# Altium PCB wifiPinBoard_1.pcbdoc (part 1 of 2)
Units mil, origin at the board's own origin, x right, y up, seen from the top; angles counter-clockwise.
Board outline 4044.61 x 2473.5 mil, 2 copper layers (Top Layer, Bottom Layer); 86 components, 80 nets, 330 pads, 327 vias.
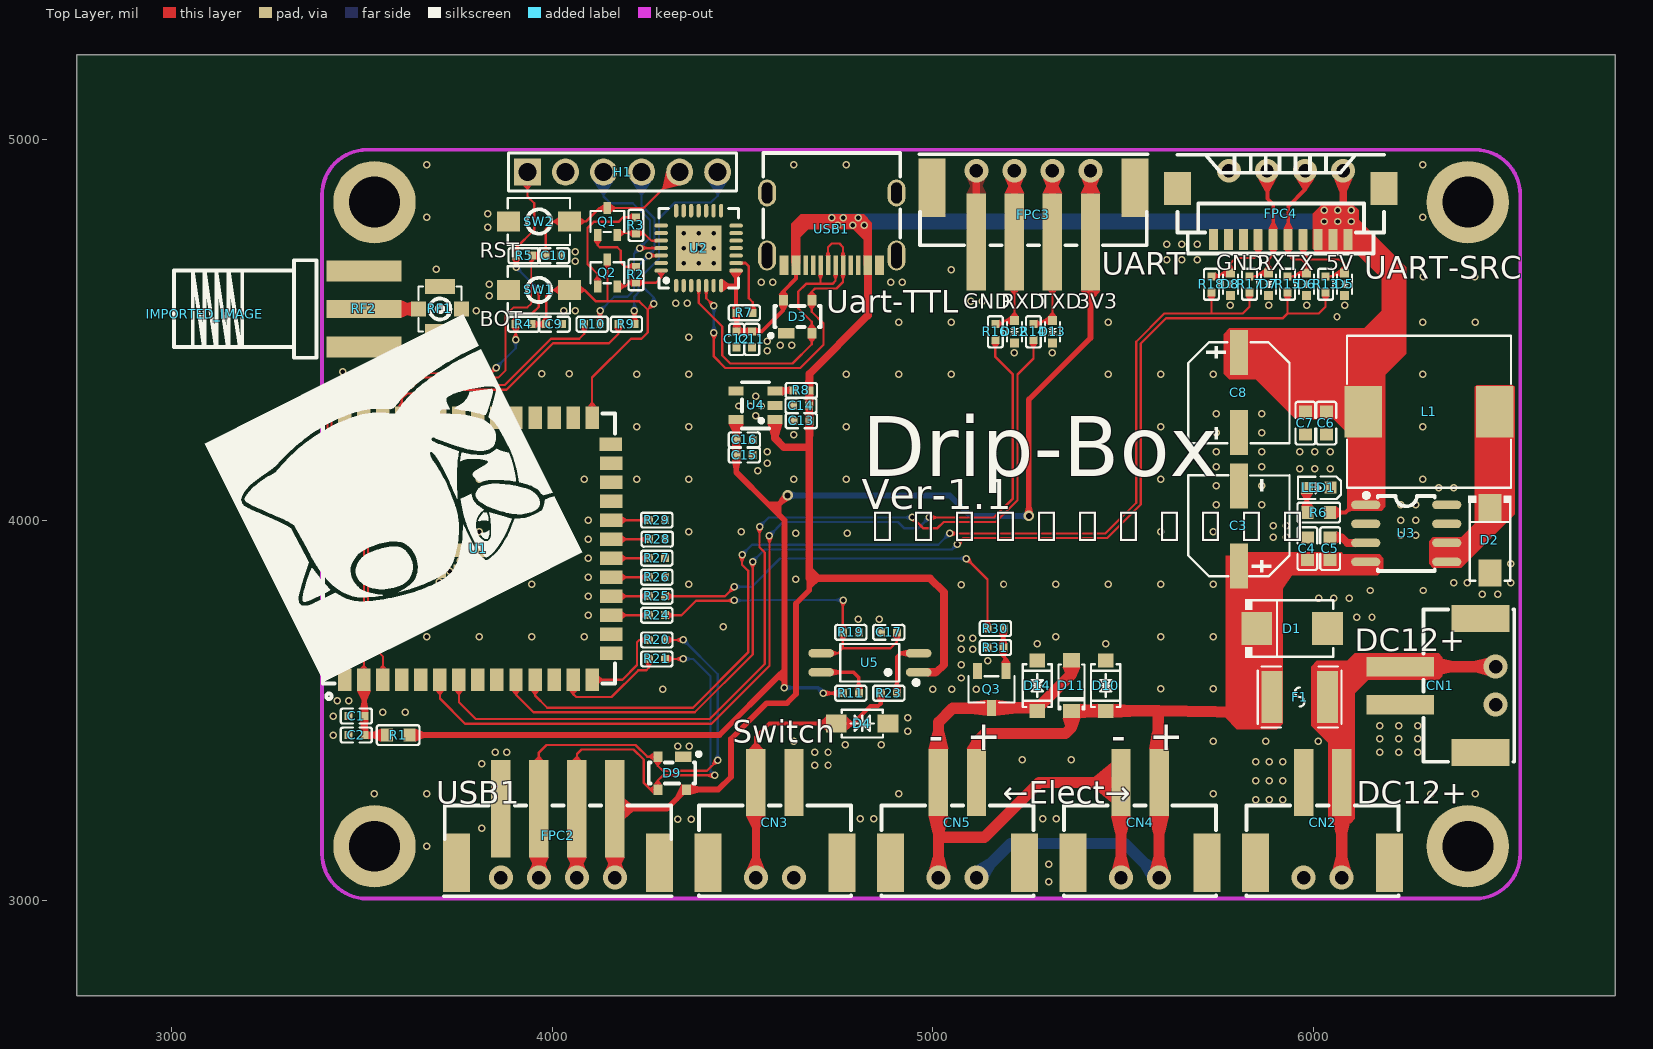
[diagram p0: Top Layer view]
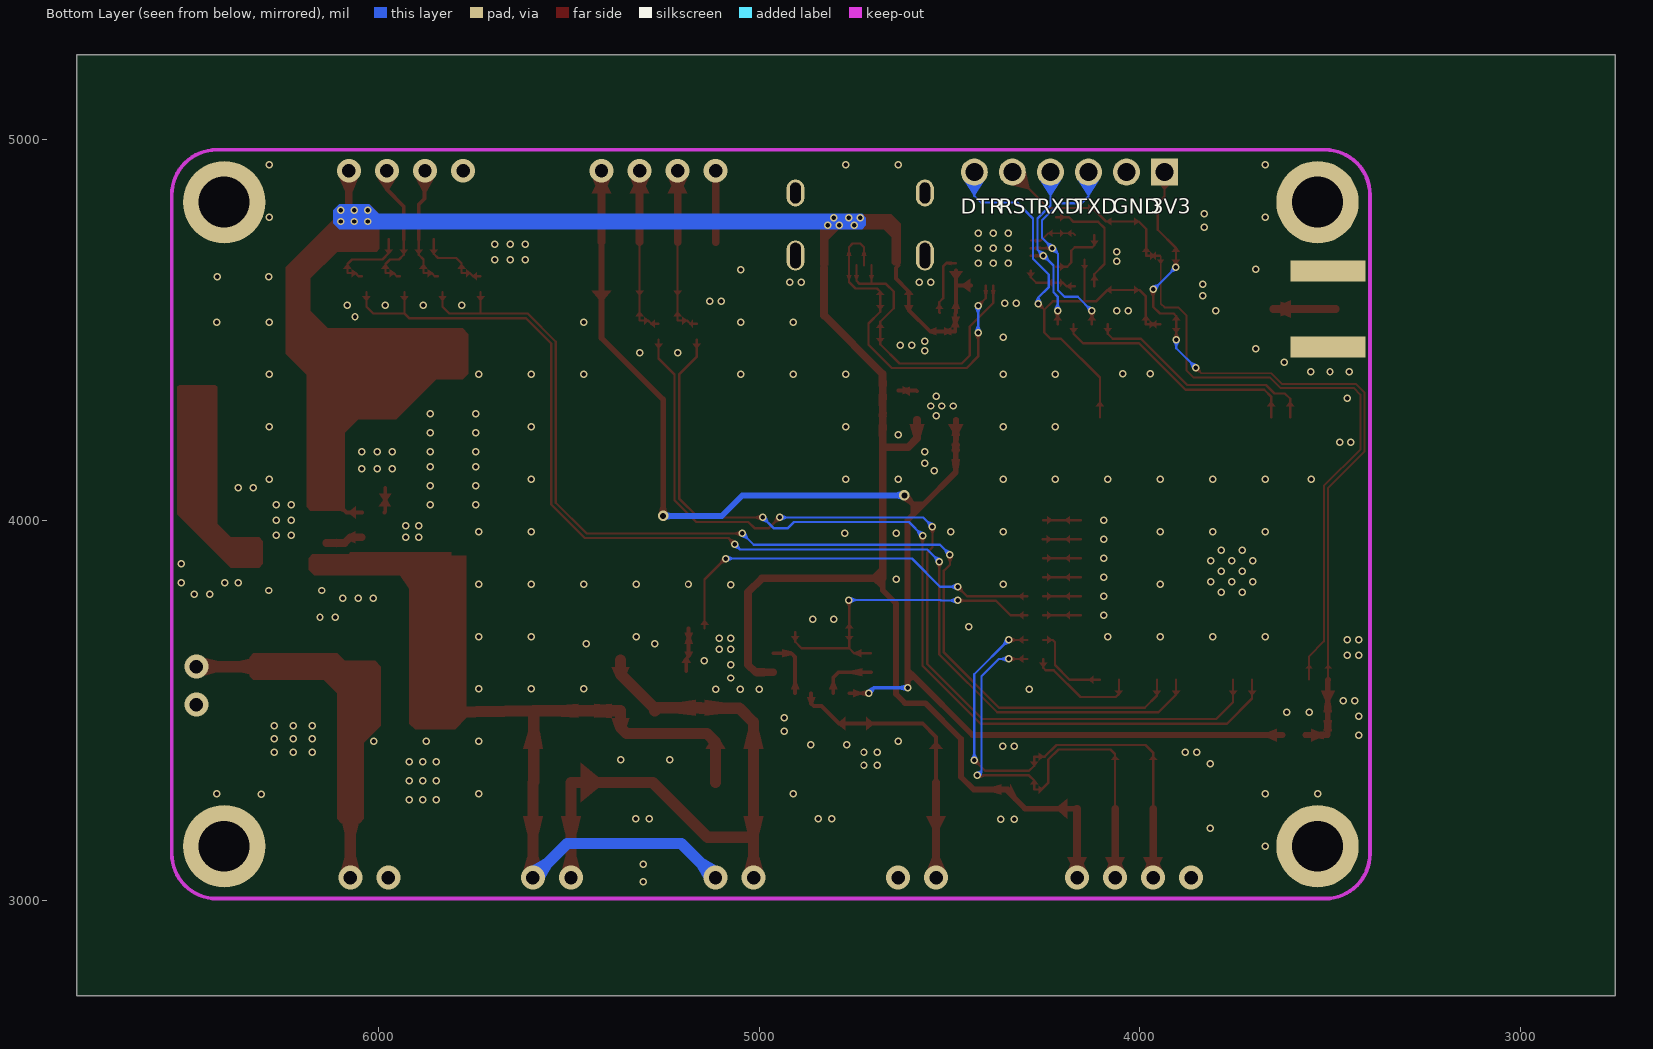
[diagram p1: Bottom Layer view, seen from below]

## Layer stack, top to bottom
Top Layer: signal copper (thickness not stored)
Dielectric: dielectric 12.6, FR-4, Dk 4.8
Bottom Layer: signal copper (thickness not stored)

## Board outline
6794.61,2750 2750,2750 2750,5223.5 6794.61,5223.5

## Components (designator, comment, footprint, x,y, rotation, side; value= is the part's Value field where it differs from the comment)
C1 "CAP-0603" C0402 3485,3485 r180 top
C2 "CAP-0603" C0402 3485,3435 r180 top
C3 "RVT47UF50V67RV0029" CAP-SMD_BD6.3-L6.6-W6.6-LS7.6-FD 5805,3985 r90 top
C4 "CAP-0603" C0603 5985,3925 r90 top
C5 "CAP-0603" C0603 6045,3925 r90 top
C6 "CAP-0603" C0603 6035,4255 r270 top
C7 "CAP-0603" C0603 5980,4255 r270 top
C8 "RVE100UF35V67RV0072" CAP-SMD_BD6.3-L6.6-W6.6-LS7.6-FD-1 5805,4335 r270 top
C9 "CAP-0402" C0402 4005,4515 r0 top
C10 "CAP-0402" C0402 4004,4695 r0 top
C11 "CAP-0402" C0402 4525,4475 r270 top
C12 "CAP-0402" C0402 4485,4475 r270 top
C13 "CAP-0402" C0402 4655,4261 r180 top
C14 "CAP-0402" C0402 4654,4301 r180 top
C15 "CAP-0402" C0402 4505,4171 r0 top
C16 "CAP-0402" C0402 4505,4211 r0 top
C17 "CAP-0402" C0402 4885,3705 r180 top
CN1 "2.54-2A-LT" CONN-SMD_2P-P2.54_XH2.54-2AB 6335,3565 r270 top
CN2 "2.54-2A-LT" CONN-SMD_2P-P2.54_XH2.54-2AB 6025,3205 r180 top
CN3 "2.54-2A-LT" CONN-SMD_2P-P2.54_XH2.54-2AB 4585.6,3205 r180 top
CN4 "2.54-2A-LT" CONN-SMD_2P-P2.54_XH2.54-2AB 5545.2,3205 r180 top
CN5 "2.54-2A-LT" CONN-SMD_2P-P2.54_XH2.54-2AB 5065.4,3205 r180 top
D1 "SMBJ16A_C2848701" SMB_L4.5-W3.7-LS5.4-RD 5945,3715 r0 top
D2 "SS54_C22452" SMA_L4.4-W2.8-LS5.4-R-RD 6465,3945 r270 top
D3 "SP0503BAHTG_C7074" SOT-143_L2.9-W1.3-P1.92-LS2.3-BR 4645,4535 r270 top
D4 "SMF6.0CA_C435459" SOD-123_L2.7-W1.8-LS3.7-BI 4815,3465 r180 top
D5 "PESD3V3S1BA-N_C316037" SOD-523_L1.2-W0.8-LS1.6-BI 6083,4620 r90 top
D6 "PESD3V3S1BA-N_C316037" SOD-523_L1.2-W0.8-LS1.6-BI 5983,4620 r90 top
D7 "PESD3V3S1BA-N_C316037" SOD-523_L1.2-W0.8-LS1.6-BI 5883,4620 r90 top
D8 "PESD3V3S1BA-N_C316037" SOD-523_L1.2-W0.8-LS1.6-BI 5783,4620 r90 top
D9 "SP0503BAHTG_C7074" SOT-143_L2.9-W1.3-P1.92-LS2.3-BR 4315,3335 r90 top
D10 "SMF12CA_C284110" SOD-123_L2.8-W1.8-LS3.7-BI 5455,3565 r90 top
D11 "1N4148W_C2099" SOD-123_L2.8-W1.8-LS3.7-RD 5365,3565 r90 top
D12 "PESD3V3S1BA-N_C316037" SOD-523_L1.2-W0.8-LS1.6-BI 5215,4495 r90 top
D13 "PESD3V3S1BA-N_C316037" SOD-523_L1.2-W0.8-LS1.6-BI 5315,4495 r90 top
D14 "SMF12CA_C284110" SOD-123_L2.8-W1.8-LS3.7-BI 5275,3565 r90 top
F1 "BSMD1812-200-24V" F1812 5965,3535 r180 top
FPC2 "XH-4PS" CONN-SMD_4P-P2.50_DEALON_XH-4PS 4015,3167.78 r0 top
FPC3 "XH-4PS" CONN-SMD_4P-P2.50_DEALON_XH-4PS 5265,4805 r180 top
FPC4 "XF3M(1)-1015-1B" FPC-SMD_10P-P1.00_XF3M1-1015-1B 5915,4805 r180 top
H1 "2.54-1x6P直针" HDR-TH_6P-P2.54-V-M-1 4185,4915 r0 top
IMPORTED_IMAGE "IMPORTED_IMAGE" IMPORTED_IMAGE 3086.35,4541.33 r0 top
L1 "SLO1040H470MTT" IND-SMD_L10.8-W10.0_SLO1040H 6305,4285 r0 top
LED1 "NCD0603R1_C84263" LED0603-RD_RED 6015,4085 r180 top
Q1 "MMST5551_C109331" SOT-323-3_L2.0-W1.3-P1.30-LS2.1-BR 4145,4785 r270 top
Q2 "MMST5551_C109331" SOT-323-3_L2.0-W1.3-P1.30-LS2.1-BR 4145,4650 r270 top
Q3 "AO3400A_C20917" SOT-23-3_L2.9-W1.6-P1.90-LS2.8-BR 5155,3555 r90 top
R1 "RES-0603" R0603 3595,3435 r180 top
R2 "RES-0402" R0402_1 4220,4645 r270 top
R3 "RES-0402" R0402_1 4220,4775 r270 top
R4 "RES-0402" R0402_1 3925,4515 r180 top
R5 "RES-0402" R0402_1 3926,4695 r180 top
R6 "RES-0603" R0603 6015,4020 r180 top
R7 "RES-0402" R0402_1 4505,4545 r0 top
R8 "RES-0402" R0402_1 4655,4341 r0 top
R9 "RES-0402" R0402_1 4195,4515 r180 top
R10 "RES-0402" R0402_1 4105,4515 r180 top
R11 "RES-0402" R0402_1 4785,3545 r0 top
R13 "RES-0402" R0402_1 6033,4620 r270 top
R14 "RES-0402" R0402_1 5265,4495 r270 top
R15 "RES-0402" R0402_1 5933,4620 r270 top
R16 "RES-0402" R0402_1 5165,4495 r270 top
R17 "RES-0402" R0402_1 5833,4620 r270 top
R18 "RES-0402" R0402_1 5733,4620 r270 top
R19 "RES-0402" R0402_1 4785,3705 r0 top
R20 "RES-0402" R0402_1 4275,3685 r180 top
R21 "RES-0402" R0402_1 4275,3635 r180 top
R23 "RES-0402" R0402_1 4885,3545 r0 top
R24 "RES-0402" R0402_1 4275,3750 r180 top
R25 "RES-0402" R0402_1 4275,3800 r180 top
R26 "RES-0402" R0402_1 4275,3850 r180 top
R27 "RES-0402" R0402_1 4275,3900 r180 top
R28 "RES-0402" R0402_1 4276,3950 r180 top
R29 "RES-0402" R0402_1 4275,4000 r180 top
R30 "RES-0402" R0402_1 5165,3715 r0 top
R31 "RES-0402" R0402_1 5165,3665 r0 top
RF1 "KH-IPEX-K501-29" ANT-SMD_KH-IPEX-K501-29 3705,4555 r270 top
RF2 "KH-SMA-KE8-G" CONN-SMD_KH-SMA-KE8-G 3485,4555.01 r90 top
SW1 "3*4两脚按键不带柱" SW-SMD_L4.0-W2.9-LS5.0 3965,4605 r0 top
SW2 "3*4两脚按键不带柱" SW-SMD_L4.0-W2.9-LS5.0 3965,4785 r0 top
U1 "ESP32-S3-WROOM-1U-N16" WIRELM-SMD_ESP32-S3-WROOM-1U 3805,3925 r90 top
U2 "CP2102-GMR_1" QFN-28_L5.0-W5.0-P0.50-BL-EP_1 4385,4715 r0 top
U3 "XL2012E1" SOIC-8_L5.0-W4.0-P1.27-LS6.0-BL 6245,3965 r270 top
U4 "spx3819m5-l-3-3/tr" SOT-23-5_L3.0-W1.7-P0.95-LS2.8-BR 4534.45,4301.55 r0 top
U5 "EL3H7(B)(TA)-G" SOP-4_L4.4-W2.8-P1.27-LS7.0-TL 4835,3625 r180 top
USB1 "TYPE-C-16P" USB-C-SMD_KH-TYPE-C-16P 4735,4765 r180 top

## Footprints (in the part's own frame and the unit in brackets; to place one, negate y for a bottom-side part, rotate by r counter-clockwise, add the part's x,y. Pads: shape width x height; smd on the part's side, far side on the other; paste and mask are expansions set on the pad)
ANT-SMD_KH-IPEX-K501-29 [mm]
  rect 1x1 smd paste+0 mask+0.051: 1(0,-1.425) 4(0,1.425)
  rect 1x2 smd paste+0 mask+0.051: 2(-1.5,0) 3(1.5,0)
  silkscreen extent -1.5,-1.42 1.5,1.42
C0402 [mil]
  rect 21x21 smd paste-3937.01 mask+2: 1(-21,0) 2(21,0)
  silkscreen extent -41,-20 41,20
C0603 [mil]
  rect 32x34 smd paste-3937.01 mask+2: 1(-29.7,0) 2(29.7,0)
  silkscreen extent -56,-26 56,26
CAP-SMD_BD6.3-L6.6-W6.6-LS7.6-FD [mm]
  rect 3x1.199 smd paste+0 mask+0.051: 1(-2.67,0) 2(2.67,0)
  silkscreen extent -3.38,-3.38 3.38,3.38
CAP-SMD_BD6.3-L6.6-W6.6-LS7.6-FD-1 [mm]
  rect 3x1.2 smd paste+0 mask+0.051: 1(-2.67,0) 2(2.67,0)
  silkscreen extent -3.38,-3.38 3.38,3.38
CONN-SMD_2P-P2.54_XH2.54-2AB [mm]
  rect 1.3x4.5 smd paste+0 mask+0.051: 1(-1.269,-2.675) 2(1.27,-2.675)
  rect 1.8x3.9 smd paste+0 mask+0.051: 3(-4.47,2.675) 4(4.47,2.675)
  silkscreen extent -5.08,-1.13 5.08,4.93
CONN-SMD_4P-P2.50_DEALON_XH-4PS [mm]
  rect 1.3x6.5 smd paste+0 mask+0.05: 1(-3.81,1.875) 2(-1.27,1.875) 3(1.27,1.875) 4(3.81,1.875)
  rect 1.8x3.9 smd paste+0 mask+0.05: 5(-6.777,-1.748) 6(6.777,-1.748)
  silkscreen extent -7.61,-3.98 7.6,2.09
CONN-SMD_KH-SMA-KE8-G [mm]
  rect 1.4x5 smd paste+0 mask+0.05: 1(-2.55,-0.508) 2(2.55,-0.508)
  rect 1.4x5 smd far side paste+0 mask+0.05: 3(-2.55,-0.508) 4(2.55,-0.508)
  rect 1.2x5 smd paste+0 mask+0.05: 5(0,-0.508)
  silkscreen extent -3.25,2.67 3.25,12.19
F1812 [mil]
  rect 55.38x137.76 smd paste-3937.01 mask+2: 1(-72.97,0) 2(72.97,0)
  silkscreen extent -110,-80 110,80
FPC-SMD_10P-P1.00_XF3M1-1015-1B [mm]
  rect 0.6x1.4 smd paste+0 mask+0.051: 1(-4.5,1.7) 2(-3.5,1.7) 3(-2.5,1.7) 4(-1.5,1.7) 5(-0.5,1.7) 6(0.5,1.7) 7(1.5,1.7) 8(2.5,1.7) 9(3.5,1.7) 10(4.5,1.7)
  rect 1.8x2.2 smd paste+0 mask+0.051: 11(6.9,-1.7) 12(-6.9,-1.7)
  silkscreen extent -6.9,-3.95 6.9,2.64
HDR-TH_6P-P2.54-V-M-1 [mm]
  rect 1.8x1.8 hole 1.2 paste+0 mask+0.051: 1(-6.35,0)
  round 1.8 hole 1.2 paste+0 mask+0.051: 2(-3.81,0) 3(-1.27,0) 4(1.27,0) 5(3.81,0) 6(6.35,0)
  silkscreen extent -7.62,-1.27 7.62,1.27
IMPORTED_IMAGE [mil]
  silkscreen extent 0,-966 993,0
IND-SMD_L10.8-W10.0_SLO1040H [mm]
  rect 2.5x3.419 smd paste+0 mask+0.051: 1(4.397,0) 2(-4.397,0)
  silkscreen extent -5.48,-5.07 5.48,5.08
LED0603-RD_RED [mm]
  rect 0.8x0.8 smd paste+0 mask+0.051: 1(-0.8,-0.003) 2(0.8,0.003)
  silkscreen extent -1.49,-0.75 1.39,0.76
QFN-28_L5.0-W5.0-P0.50-BL-EP_1 [mm]
  oval 0.279x0.899 smd paste+0 mask+0.051: 1(-1.501,-2.499) 2(-1.001,-2.499) 3(-0.5,-2.499) 4(0,-2.499) 5(0.5,-2.499) 6(1.001,-2.499) 7(1.501,-2.499) 15(1.501,2.499) 16(1.001,2.499) 17(0.5,2.499) 18(0,2.499) 19(-0.5,2.499) 20(-1.001,2.499) 21(-1.501,2.499)
  oval 0.899x0.279 smd paste+0 mask+0.051: 8(2.499,-1.501) 9(2.499,-1.001) 10(2.499,-0.5) 11(2.499,0) 12(2.499,0.5) 13(2.499,1.001) 14(2.499,1.501) 22(-2.499,1.501) 23(-2.499,1.001) 24(-2.499,0.5) 25(-2.499,0) 26(-2.499,-0.5) 27(-2.499,-1.001) 28(-2.499,-1.501)
  round 0.5 hole 0.3 paste+0 mask-25.4: 29(-1,-1) 29(-1,0) 29(-1,1) 29(0,-1) 29(0,0) 29(0,1) 29(1,-1) 29(1,0) 29(1,1)
  rect 3.048x3.048 smd paste+0 mask+0.051: 29(0,0)
  silkscreen extent -2.65,-2.65 2.65,2.65
R0402_1 [mil]
  rect 21x21 smd paste-3937.01 mask+2: 1(-21,0) 2(21,0)
  silkscreen extent -41,-20 41,20
R0603 [mil]
  rect 31.8x34 smd paste-3937.01 mask+2: 1(-29.7,0) 2(29.7,0)
  silkscreen extent -56,-26 56,26
SMA_L4.4-W2.8-LS5.4-R-RD [mm]
  rect 1.8x1.539 smd paste+0 mask+0.051: 1(2.123,0) 2(-2.25,0)
  silkscreen extent -3.03,-1.43 2.65,1.43
SMB_L4.5-W3.7-LS5.4-RD [mil]
  rect 80.6x86.3 smd paste+0 mask+2: 1(-92.9,0) 2(92.9,0)
  silkscreen extent -123,-77 108,77
SOD-123_L2.7-W1.8-LS3.7-BI [mm]
  rect 1.4x1.2 smd paste+0 mask+0.051: 1(-1.735,0) 2(1.735,0)
  silkscreen extent -1.38,-0.93 1.38,0.93
SOD-123_L2.8-W1.8-LS3.7-BI [mm]
  rect 0.93x1.06 smd paste+0 mask+0.051: 1(1.685,0) 2(-1.685,0)
  silkscreen extent -1.43,-0.98 1.43,0.98
SOD-123_L2.8-W1.8-LS3.7-RD [mm]
  rect 0.95x1.15 smd paste+0 mask+0.051: 1(-1.692,0) 2(1.692,0)
  silkscreen extent -1.58,-0.87 1.41,0.87
SOD-523_L1.2-W0.8-LS1.6-BI [mm]
  rect 0.6x0.6 smd paste+0 mask+0.051: 1(-0.75,0) 2(0.75,0)
  silkscreen extent -0.65,-0.5 0.65,0.5
SOIC-8_L5.0-W4.0-P1.27-LS6.0-BL [mil]
  oval 22.38x76.78 smd paste+0 mask+2: 1(-75,-106.5) 2(-25,-106.5) 3(25,-106.5) 4(75,-106.5) 5(75,106.5) 6(25,106.5) 7(-25,106.5) 8(-75,106.5)
  silkscreen extent -106,-111 98,75
SOP-4_L4.4-W2.8-P1.27-LS7.0-TL [mm]
  oval 1.71x0.56 smd paste+0 mask+0.051: 1(-3.255,0.635) 2(-3.255,-0.635) 3(3.255,-0.635) 4(3.255,0.635)
  silkscreen extent -3.24,-1.25 1.97,1.47
SOT-23-3_L2.9-W1.6-P1.90-LS2.8-BR [mm]
  rect 1.07x0.6 smd paste+0 mask+0.051: 1(1.235,-0.95) 2(1.235,0.95) 3(-1.235,0)
  silkscreen extent -0.88,-1.54 0.88,1.54
SOT-23-5_L3.0-W1.7-P0.95-LS2.8-BR [mil]
  rect 39.4x23.6 smd paste+0 mask+2: 1(51.2,-37.4) 2(51.2,0) 3(51.2,37.4) 4(-51.2,37.4) 5(-51.2,-37.4)
  silkscreen extent -35,-61 35,61
SOT-143_L2.9-W1.3-P1.92-LS2.3-BR [mm]
  rect 0.7x1.1 smd paste+0 mask+0.051: 1(1.1,-0.75)
  rect 0.7x0.6 smd paste+0 mask+0.051: 2(1.1,0.95) 3(-1.1,0.95) 4(-1.1,-0.95)
  silkscreen extent -0.7,-1.9 1.4,1.55
SOT-323-3_L2.0-W1.3-P1.30-LS2.1-BR [mm]
  rect 0.8x0.5 smd paste+0 mask+0.051: 1(0.898,-0.65) 2(0.898,0.65) 3(-0.898,0)
  silkscreen extent -0.7,-1.13 0.7,1.13
SW-SMD_L4.0-W2.9-LS5.0 [mm]
  rect 1.53x1.36 smd paste+0 mask+0.051: 1(-2.035,0) 2(2.035,0)
  silkscreen extent -2.08,-1.58 2.08,1.58
USB-C-SMD_KH-TYPE-C-16P [mm]
  oval 1.2x2 hole 0.7 slot 1.7 at 90 deg paste+0 mask+0.051: 1(-4.32,1.765) 2(4.32,1.765)
  oval 1.2x1.8 hole 0.7 slot 1.4 at 90 deg paste+0 mask+0.051: 3(-4.32,-2.415) 4(4.32,-2.415)
  rect 0.3x1.3 smd paste-100 mask+0.051: A1(-3.35,2.415) A4(-2.55,2.415) A5(-1.25,2.415) A6(-0.25,2.415) A7(0.25,2.415) A8(1.25,2.415) A9(2.55,2.415) A12(3.35,2.415) B1(3.05,2.415) B4(2.25,2.415) B5(1.75,2.415) B6(0.75,2.415) B7(-0.75,2.415) B8(-1.75,2.415) B9(-2.25,2.415) B12(-3.05,2.415)
  silkscreen extent -4.57,-5.08 4.57,0.57
WIRELM-SMD_ESP32-S3-WROOM-1U [mm]
  rect 1.5x0.9 smd paste+0 mask+0.05: 1(-8.75,8.895) 2(-8.75,7.625) 3(-8.75,6.355) 4(-8.75,5.085) 5(-8.75,3.815) 6(-8.75,2.545) 7(-8.75,1.275) 8(-8.75,0.005) 9(-8.75,-1.265) 10(-8.75,-2.535) 11(-8.75,-3.805) 12(-8.75,-5.075) 13(-8.75,-6.345) 14(-8.75,-7.615) 27(8.75,-7.615) 28(8.75,-6.345) 29(8.75,-5.075) 30(8.75,-3.805) 31(8.75,-2.535) 32(8.75,-1.265) 33(8.75,0.005) 34(8.75,1.275) 35(8.75,2.545) 36(8.75,3.815) 37(8.75,5.085) 38(8.75,6.355) 39(8.75,7.625) 40(8.75,8.895)
  rect 0.9x1.5 smd paste+0 mask+0.05: 15(-6.985,-8.895) 16(-5.715,-8.895) 17(-4.445,-8.895) 18(-3.175,-8.895) 19(-1.905,-8.895) 20(-0.635,-8.895) 21(0.635,-8.895) 22(1.905,-8.895) 23(3.175,-8.895) 24(4.445,-8.895) 25(5.715,-8.895) 26(6.985,-8.865)
  rect 0.9x0.9 smd paste+0 mask+0.051: 41(-2.9,-0.225) 41(-2.9,1.175) 41(-2.9,2.575) 41(-1.5,2.575) 41(-1.5,-0.225) 41(-1.5,1.175) 41(-0.1,2.575) 41(-0.1,1.175) 41(-0.1,-0.225)
  silkscreen extent -10.04,-9.14 9.02,10.36

## Free pads (board coordinates)
  round 216.54 hole 133.86 mask+4: 1(3532.8,3142.8) 1(6406.81,3142.8) 1(6406.81,4835.71) 3(3532.8,4835.71)

## Via types
v1: diameter 19.68, hole 11.81, Top Layer to Bottom Layer, 286 vias
v2: diameter 62.99, hole 35.43, Top Layer to Bottom Layer, 22 vias
v3: diameter 19.7, hole 11.81, Top Layer to Bottom Layer, 17 vias
v4: diameter 27.56, hole 15.75, Top Layer to Bottom Layer, 2 vias

## Nets (pads, with @x,y where several pads share a name; then routed paths per layer and width w, separated by ;. In a path a pad name is that pad's centre, name@x,y a point inside that pad or via, vN(x,y) a via of type N, cw(c..) or ccw(c..) an arc to the next point about the centre after c; other vN are vias at no path point)
3V3: C15.1 C16.1 FPC3.1 R1.1 R11.1 U4.5 | length 3731.6
  Top Layer w10: v1(4713,3545) R11.1@4764,3545
  Top Layer w15: R1.1@3624.7,3435 4440,3435 4594.39,3589.39 ; U4.5@4483.25,4264.15 4483.25,4211.75 C16.1@4484,4211 C15.1@4484,4171 4484,4126 4568.51,4041.49 ; v1(4610.49,3559.51) 4610.49,3576.99 ; v4(4619,4065) 4595.49,4041.49 ; v4(5253,4011) 5253,4317 5415,4479 FPC3.1@5415,4731.18 ; 4568.51,4041.49 4582,4028 ; 4568.51,4041.49 4595.49,4041.49 ; 4582,4028 4595.49,4041.49 ; 4582,4028 4595.49,4014.51 ; 4594.39,3589.39 4598.1,3589.39 4610.49,3576.99 ; 4594.39,3589.39 4610.49,3605.49 ; 4595.49,4014.51 4610.49,3999.51 4610.49,3605.49 ; 4595.49,4014.51 4595.49,4041.49 ; 4610.49,3576.99 4610.49,3605.49
  Top Layer w20: FPC3.1@5415,4731.18 v2(5415,4918.39)
  Bottom Layer w10: v1(4610.49,3559.51) 4698.49,3559.51 v1(4713,3545)
  Bottom Layer w15: v4(4619,4065) 5045,4065 5099,4011 v4(5253,4011)
5V: C6.1 C7.1 C8.1 C11.1 C12.1 C13.1 C14.1 D3.4 D9.4 FPC2.4 FPC4.1 FPC4.2 FPC4.3 L1.2 R6.1 R7.1 R8.2 U2.7 U2.8 U3.1 U4.1 U5.1 USB1.A4 USB1.A9 USB1.B4 USB1.B9 | length 3657.6
  Top Layer w10: U2.7@4444.1,4616.6 4483.4,4616.6 ; U2.8@4483.4,4655.9 4483.4,4616.6 ; USB1.A9@4634.6,4669.93 4641,4663.53 4641,4635 4607.6,4601.6 D3.4@4607.6,4578.31 4607.6,4552.6 4551,4496 C11.1@4525,4496 C12.1@4485,4496 4485,4544 R7.1@4484,4545 4483.4,4545.6 4483.4,4616.6 ; R6.1@6044.7,4020 6085,4020 6105,4040 U3.1@6138.5,4040
  Top Layer w15: FPC2.4@4165,3241.6 4301.6,3241.6 D9.4@4351.69,3291.7 ; D9.4@4347.4,3291.7 D9.4@4351.69,3291.7 ; 4431.69,3291.7 4426.69,3291.7 D9.4@4351.69,3291.7 ; 4436.69,3291.7 4470,3325 4470,3425 4564,3519 4617,3519 4641,3543 4641,3781 4676,3816 4676,3825.14 ; 4676,3847 4676,3825.14 ; 4697.86,3847 4676,3825.14
  Top Layer w20: v2(4165,3060.12) FPC2.4@4165,3241.6 ; U4.1@4585.65,4264.15 4585.65,4215.35 4609,4192 4674,4192 ; USB1.A4@4830,4663.5 4830,4538 4676,4384 R8.2@4676,4341 4676,4282 4675,4281 4676,4280 C13.1@4676,4261 4676,4194 4674,4192 ; U5.1@4963.15,3600 5010,3600 5030,3620 5030,3810 4993,3847 4697.86,3847 ; FPC4.2@6052.79,4738.07 6079.02,4764.3 v2(6079.02,4918.39) ; 4674,4192 4676,4190 4676,3868.86 ; 4676,3868.86 4697.86,3847 ; 4676,3868.86 4676,3847 4697.86,3847
  other v1: 4750,4775 4790,4775 4820,4775 6030,4785 6065,4785 6100,4785 4735,4795 4765,4795 4805,4795 6030,4815 6065,4815 6100,4815
12V: C3.1 C4.1 C5.1 CN4.1 CN5.1 D1.1 D10.2 D11.1 F1.2 U3.4 | length 1922.5
  Top Layer w30: CN5.1@5115.37,3310.32 5115.37,3416.37 5138,3439 5349,3439 5365,3455 D11.1@5365,3498.37 5454.71,3498.37 D10.2@5455,3498.66 5593,3498.66 ; v2(5595.17,3060.12) CN4.1@5595.17,3310.32 5593,3312.49 5593,3498.66 ; 5862.03,3535 5822.03,3495 5593,3498.66
  Bottom Layer w30: v2(5115.37,3060.12) 5205.25,3150 5505.29,3150 v2(5595.17,3060.12)
$1N8464: C17.1 R19.1 R24.1 U5.3 | length 849.6
  Top Layer w6: R24.1@4296,3750 4340,3750 4378,3788 4478,3788 v3(4479,3789) ; U5.3@4706.85,3650 4751,3650 4764,3663 ; v3(4765,3790) 4764,3789 R19.1@4764,3705 4764,3663 ; C17.1@4906,3705 4906,3680 4889,3663 4764,3663
  Bottom Layer w6: v3(4479,3789) 4523,3789 4524,3790 v3(4765,3790)
$1N8479: R25.1 R30.1 | length 1040.8
  Top Layer w6: R25.1@4296,3800 4454,3800 v3(4479,3825) ; v3(5089,3899) 5144,3844 R30.1@5144,3715
  Bottom Layer w6: v3(4479,3825) 4525,3825 4599,3899 v3(5089,3899)
$1N8494: R26.1
$1N8526: R27.1
$1N8541: R28.1
$1N8556: R29.1
$1N10942: Q1.1 R2.1 | length 169.2
  Top Layer w6: Q1.1@4119.41,4749.65 4119.41,4722.59 4125,4717 4171,4717 4180,4708 4180,4677 4191,4666 R2.1@4220,4666
$1N10943: Q2.1 R3.1 | length 302.9
  Top Layer w6: Q2.1@4119.41,4614.65 4119.41,4646.59 4093,4673 4093,4768 4109,4784 4174,4784 4186,4796 R3.1@4220,4796
$1N10945: U2.27
$1N10949: U2.23
$1N10950: U2.22
$1N10953: U2.10
$1N10954: U2.11
$1N10955: U2.12
$1N10958: R7.2 U2.9 | length 163.7
  Top Layer w6: U2.9@4483.4,4675.6 4508.4,4675.6 4517,4667 4517,4583 4527,4573 4527,4546 R7.2@4526,4545
$1N13323: H1.3 R10.1 U2.25 | length 616.5
  Top Layer w6: R10.1@4126,4515 v1(4126,4550) ; v1(4230,4715) U2.25@4286.6,4715
  Bottom Layer w6: v1(4126,4550) 4163,4587 4198.03,4587 4215,4603.97 4215,4700 v1(4230,4715) 4257,4742 4257,4788.03 4212.03,4833 4153,4833 4135,4851 H1.3@4135,4915
$1N13324: H1.4 R9.1 U2.26 | length 469.3
  Top Layer w6: R9.1@4216,4515 v1(4216,4550) ; v1(4253.3,4695.3) U2.26@4286.6,4695.3
  Bottom Layer w6: v1(4216,4550) 4216,4588 4227,4599 4227,4669 v1(4253.3,4695.3) 4269,4711 4269,4793 4235,4827 H1.4@4235,4915
$1N32414: C5.2 U3.3 | length 99.6
  Top Layer w20: C5.2@6045,3954.7 6075.3,3954.7 6090,3940 U3.3@6138.5,3940
$1N33521: D2.2 L1.1 U3.5 U3.6
$1N37918: R8.1 U4.3 | length 49.2
  Top Layer w10: U4.3@4585.65,4338.95 4587.7,4341 R8.1@4634,4341
$1N54194: D9.2 FPC2.2 R20.1 | length 1263.2
  Top Layer w6: FPC2.2@3965,3241.6 3965,3389 3985,3409 4219,3409 4249.69,3378.3 D9.2@4277.6,3378.3 4277.6,3354.41 4291,3341 4407,3341 v3(4435,3369) ; R20.1@4296,3685 v3(4345,3685)
  Top Layer w20: v2(3965,3060.12) FPC2.2@3965,3241.6
  Bottom Layer w6: v3(4345,3685) 4435,3595 v3(4435,3369)
$1N54195: D9.3 FPC2.3 R21.1 | length 1204.9
  Top Layer w6: FPC2.3@4065,3241.6 4065,3385 4077,3397 4214.03,3397 4241,3370.03 4241,3309 4258.31,3291.7 D9.3@4277.6,3291.7 4277.6,3315.59 4291,3329 v3(4427,3329) ; R21.1@4296,3635 v3(4345,3635)
  Top Layer w20: v2(4065,3060.12) FPC2.3@4065,3241.6
  Bottom Layer w6: v3(4345,3635) 4371,3635 4416.15,3589.85 4416.15,3339.85 v3(4427,3329)
$1N71351: LED1.2 R6.2 | length 65.6
  Top Layer w10: LED1.2@5983.52,4084.86 5983.52,4021.78 R6.2@5985.3,4020
$1N82815: CN4.2 CN5.2 D11.2 D14.2 Q3.3 | length 1647.6
  Top Layer w30: v2(5015.37,3060.12) 5015.38,3166 ; D14.2@5275,3498.66 D14.2@5267.28,3506.38 ; D11.2@5365,3631.63 5365,3595 5276.38,3506.38 D14.2@5267.28,3506.38 ; v2(5495.17,3060.12) CN4.2@5495.18,3310.32 5280.31,3310.32 5136,3166 5015.38,3166 ; 5015.38,3166 CN5.2@5015.38,3310.32 5015.38,3468.38 5053,3506 5154.62,3506 Q3.3@5155,3506.38 D14.2@5267.28,3506.38
$1N83572: Q3.1 R30.2 R31.2 | length 114
  Top Layer w10: R30.2@5186,3715 R31.2@5186,3665 5186,3642 5192.4,3635.6 Q3.1@5192.4,3603.62
$1N90245: R23.2 U5.2 | length 156.3
  Top Layer w10: R23.2@4906,3545 4906,3640 4916,3650 U5.2@4963.15,3650
$1N90372: CN3.2 D4.2 R23.1 | length 761.7
  Top Layer w10: CN3.2@4535.58,3310.32 4535.58,3430 4570.58,3465 D4.2@4746.7,3465 4791,3465 4837,3511 4857,3511 4864,3518 R23.1@4864,3545
  Top Layer w20: v2(4535.57,3060.12) CN3.2@4535.58,3310.32
$1N106267: RF1.1 RF2.5 | length 163.9
  Top Layer w20: RF2.5@3485,4555 RF1.1@3648.9,4555
$1N107623: R11.2 U5.4 | length 145.9
  Top Layer w10: U5.4@4706.85,3600 4792,3600 4806,3586 R11.2@4806,3545
DTR: Q2.2 R2.2 U2.28 | length 143.2
  Top Layer w6: Q2.2@4170.59,4614.65 4192.65,4614.65 4202,4624 R2.2@4220,4624 4272,4624 4286.6,4638.6 U2.28@4286.6,4655.9
EN: C10.1 H1.5 Q1.3 R5.1 SW2.2 U1.3 | length 2160.6
  Top Layer w5: U1.3@3554.8,3580.51 3554.8,3642.2 3515.8,3681.2 3515.8,4089.75 3420,4185.56 3420,4330 3437.34,4347.34 3630.9,4347.34 3658.56,4375 3859,4375 3877,4393 3877,4537 3899,4559 3935,4559 3945,4569 3945,4693 R5.1@3947,4695
  Top Layer w6: R5.1@3947,4695 C10.1@3983,4695 3983,4765 4003,4785 SW2.2@4045.12,4785 4089,4785 4124.35,4820.35 Q1.3@4145,4820.35 4240.35,4820.35 H1.5@4335,4915
EX_RXD: D12.2 FPC3.3 R16.1 | length 447.4
  Top Layer w6: R16.1@5165,4516 5182,4516 5190.53,4524.53 D12.2@5215,4524.53 FPC3.3@5215,4731.18
  Top Layer w20: FPC3.3@5215,4731.18 v2(5215,4918.39)
EX_TXD: D13.2 FPC3.2 R14.1 | length 441.7
  Top Layer w6: R14.1@5265,4516 5284,4516 5292.53,4524.53 D13.2@5315,4524.53 FPC3.2@5315,4731.18
  Top Layer w20: FPC3.2@5315,4731.18 v2@5315,4912.66
  other v2: 5315,4918.39
GND: C1.2 C2.2 C3.2 C4.2 C6.2 C7.2 C8.2 C9.2 C10.2 C11.2 C12.2 C13.2 C14.2 C15.2 C16.2 C17.2 CN1.2 CN1.3 CN1.4 CN2.2 CN2.3 CN2.4 CN3.1 CN3.3 CN3.4 CN4.3 CN4.4 CN5.3 CN5.4 D1.2 D2.1 D3.1 D4.1 D5.1 D6.1 D7.1 D8.1 D9.1 D10.1 D12.1 D13.1 D14.1 FPC2.1 FPC2.5 FPC2.6 FPC3.4 FPC3.5 FPC3.6 FPC4.8 FPC4.9 FPC4.10 FPC4.11 FPC4.12 H1.2 LED1.1 pad.1 pad.3 Q3.2 R19.2 R31.1 RF1.2 RF1.3 RF1.4 RF2.1 RF2.2 RF2.3 RF2.4 SW1.1 SW2.1 U1.1 U1.40 U1.41 U2.3 U2.29 U3.7 U3.8 U4.2 USB1.1 USB1.2 USB1.3 USB1.4 USB1.A1 USB1.A12 USB1.B1 USB1.B12 | length 187.2
  Top Layer w20: FPC3.4@5115,4731.18 v2(5115,4918.39)
  other v1: 5305,3050 5305,3095 3670.59,3142.8 3815,3190 4330.43,3214.27 4365.43,3214.27 4810.2,3215 4845.2,3215 5290,3215 5325,3215 5850,3265 5885,3265 5920,3265 6310,3280 3532.8,3280.59 3670.59,3280.59 4910.75,3280.59 5737.52,3280.59 6426.5,3280.59 5850,3315 5885,3315 5920,3315 4690,3355 4725,3355 3815,3360 5850,3365 5885,3365 5920,3365 5235,3370 5365,3370 3850,3390 3880,3390 4690,3390 4725,3390 6175,3390 6225,3390 6275,3390 4330,3405 4360,3405 4770,3410 4865,3410 4635.16,3418.39 5737.52,3418.39 5875.32,3418.39 6013.11,3418.39 6175,3425 6225,3425 6275,3425 3425,3435 4935,3445 6175,3460 6225,3460 6275,3460 4935,3480 3425,3485 3555,3495 3613.9,3495 3435,3525 3465,3525 4290,3555 5000,3555 5050,3555 5115,3555 5461.93,3556.18 5599.72,3556.18 5737.52,3556.18 5075,3585 5075,3620 5145,3630 3425,3645 3455,3645 5075,3660 5105,3660 5275,3675 5455,3675 3425,3685 3455,3685 5075,3690 5105,3690 3670.59,3693.98 3808.39,3693.98 3946.18,3693.98 4083.98,3693.98 5324.13,3693.98 5599.72,3693.98 5737.52,3693.98 4450,3720 4805,3740 4860,3740 6155,3745 4095,3750 6015,3795 6055,3795 6095,3795 4095,3800 6445,3805 6485,3805 3731.18,3810.81 3786.3,3810.81 6150,3815 6290,3815 5075,3830 3946.18,3831.77 4359.57,3831.77 5186.34,3831.77 5324.13,3831.77 5461.93,3831.77 5599.72,3831.77 5737.52,3831.77 6370,3835 6405,3835 6520,3835 3703.62,3838.37 3758.74,3838.37 3813.86,3838.37 4640,3845 4095,3850 3731.18,3865.93 3786.3,3865.93 6520,3885 3703.62,3893.49 3758.74,3893.49 3813.86,3893.49 4095,3900 3731.18,3921.05 3786.3,3921.05 4095,3950 5895,3955 5930,3955 6230,3960 6270,3960 4640,3965 4775,3965 3670.59,3969.57 3808.39,3969.57 3946.18,3969.57 4359.57,3969.57 4497.36,3969.57 5599.72,3969.57 5737.52,3969.57 5895,3985 5930,3985 4095,4000 6230,4000 6270,4000 5745,4040 5865,4040.2 6230,4040 6270,4040 6330,4085 6370,4085 5745,4090 5865,4090.2 3549,4107 3670.59,4107.36 3808.39,4107.36 3946.18,4107.36 4083.98,4107.36 4221.77,4107.36 4359.57,4107.36 4635.16,4107.36 4772.95,4107.36 5599.72,4107.36 6288.7,4107.36 4540,4130 5965,4135 6005,4135 6045,4135 5745,4140 5865,4140.2 4565,4150 4565,4180 5745,4179.8 5865,4180 5965,4180 6005,4180 6045,4180 3445,4205 3475,4205 4635,4225 5745,4229.8 5865,4230 4221.77,4245.16 4359.57,4245.16 4772.95,4245.16 5599.72,4245.16 6288.7,4245.16 4535,4275 5745,4279.8 5865,4280 4490,4300 4520,4300 4550,4300 3455,4320 4535,4325 4221.77,4382.95 4359.57,4382.95 4772.95,4382.95 4910.75,4382.95 5048.54,4382.95 5461.93,4382.95 5599.72,4382.95 5737.52,4382.95 6288.7,4382.95 3973,4385 4045,4385 3450,4390 3500,4390 3550,4390 3620,4415 5215,4440 5315,4440 4565,4445 3695,4450 4600,4460 4630,4460 4565,4470 4359.57,4480.75 4910.75,4520.75 5048.54,4520.75 5461.93,4520.75 6288.7,4520.75 6426.5,4520.75 6063,4535 3800,4550 4030,4550 4060,4550 5783,4565 5883,4565 5983,4565 6083,4565 4325,4570 4355,4570 5100,4575 5130,4575 3835,4590 3835,4620 4550,4625 4580,4625 4890,4625 4920,4625 6290,4640 6425,4640 5048.54,4658.54 3695,4660 4060,4680 5615,4685 5655,4685 5695,4685 4060,4705 5615,4725 5655,4725 5695,4725 3830,4770 3670.59,4796.34 6288.7,4796.34 3830,4805 3670.59,4934.13 4635.16,4934.13 4772.95,4934.13 6288.7,4934.13
  other v2: 3865,3060.12 4635.57,3060.12 5974.98,3060.12 6479.88,3514.97 5779.02,4918.39
  other v3: 6115,3745
IO0: C9.1 H1.6 Q2.3 R4.1 SW1.2 U1.27 | length 1393.9
  Top Layer w5: 4145,4575 Q2.3@4145,4685.35
  Top Layer w6: R4.1@3946,4515 C9.1@3984,4515 3984,4588 4001,4605 SW1.2@4045.12,4605 4085,4605 4115,4575 4145,4575 4229,4575 4251,4553 ; U1.27@4104.81,4269.49 4104.81,4374.81 4207,4477 4235,4477 4251,4493 4251,4553 ; v1(4267,4569) 4251,4553
  Bottom Layer w6: v1(4267,4569) 4267,4585 4239,4613 4239,4645 4281,4687 4281,4793 4323,4835 4417,4835 4435,4853 H1.6@4435,4915
IO1: U1.39
IO2: U1.38
IO4: U1.4
IO5: U1.5
IO6: R16.2 U1.6 | length 2477.8
  Top Layer w6: U1.6@3704.8,3580.51 3704.8,3531.2 3771,3465 4419,3465 4571,3617 v3(4571,3959) ; v3(4991,4007) 5161,4007 5211,4057 5211,4383 5165,4429 R16.2@5165,4474
  Bottom Layer w6: v3(4571,3959) 4607,3995 4909,3995 4925,3979 4963,3979 v3(4991,4007)
IO7: R14.2 U1.7 | length 2477.8
  Top Layer w6: U1.7@3754.8,3580.51 3754.8,3521.2 3799,3477 4414.03,3477 4559,3621.97 4559,3915 4545,3929 v3(4545,3983) ; v3(4947,4007) 4975,3979 5013,3979 5029,3995 5165.97,3995 5223,4052.03 5223,4383 5265,4425 R14.2@5265,4474
  Bottom Layer w6: v3(4545,3983) 4569,4007 v3(4947,4007)
IO8: U1.12
IO9: R24.2 U1.17 | length 98.8
  Top Layer w6: U1.17@4155.19,3750 R24.2@4254,3750
IO10: R25.2 U1.18 | length 98.8
  Top Layer w6: U1.18@4155.19,3800 R25.2@4254,3800
IO11: R26.2 U1.19 | length 98.8
  Top Layer w6: U1.19@4155.19,3850 R26.2@4254,3850
IO12: R27.2 U1.20 | length 98.8
  Top Layer w6: U1.20@4155.19,3900 R27.2@4254,3900
IO13: R28.2 U1.21 | length 99.8
  Top Layer w6: U1.21@4155.19,3950 R28.2@4255,3950
IO14: R29.2 U1.22 | length 98.8
  Top Layer w6: U1.22@4155.19,4000 R29.2@4254,4000
IO15: U1.8
IO16: U1.9
IO17: R13.2 R15.2 U1.10 | length 3112.9
  Top Layer w6: U1.10@3904.8,3580.51 3904.8,3541.2 3951,3495 4375,3495 4527,3647 v3(4527,3891) ; v3(5065,3937) 5081,3953 5459,3953 5547,4041 5547,4464.03 5613.97,4531 5921,4531 5933,4543 ; R15.2@5933,4599 5933,4543 ; R13.2@6033,4599 6033,4561 6015,4543 5933,4543
  Bottom Layer w6: v3(4527,3891) 4559,3923 5051,3923 v3(5065,3937)
IO18: R17.2 R18.2 U1.11 | length 2884.4
  Top Layer w6: U1.11@3954.8,3580.51 3954.8,3539.2 3987,3507 4370.03,3507 4515,3651.97 4515,3867 4499,3883 v3(4499,3909) ; v3(5045,3965) 5454.03,3965 5535,4045.97 5535,4469 5609,4543 5733,4543 ; R18.2@5733,4599 5733,4543 ; R17.2@5833,4599 5833,4561 5815,4543 5733,4543
  Bottom Layer w6: v3(4499,3909) 4525,3935 5015,3935 v3(5045,3965)
IO19: R21.2 U1.13 | length 294.8
  Top Layer w6: U1.13@4054.8,3580.51 4054.8,3543.2 4063,3535 4155.97,3535 4225.97,3605 4247,3605 4254,3612 R21.2@4254,3635
IO20: R20.2 U1.14 | length 227.6
  Top Layer w6: U1.14@4104.81,3580.51 4184.51,3580.51 4223,3619 4223,3679 4229,3685 R20.2@4254,3685
IO21: U1.23
IO35: U1.28
IO36: U1.29
IO37: U1.30
IO38: U1.31
IO39: U1.32
IO40: U1.33
IO41: U1.34
IO42: U1.35
IO47: U1.24
IO48: U1.25
RTS: Q1.2 R3.2 U2.24 | length 125.8
  Top Layer w5: Q1.2@4170.59,4749.65 4174.94,4754 R3.2@4220,4754 4241,4754 4260.3,4734.7 U2.24@4286.6,4734.7
RXD0: R9.2 U1.36 | length 667.9
  Top Layer w6: U1.36@3654.8,4269.49 3654.8,4324.81 3673,4343 3879.97,4343 4001.97,4465 4149,4465 4174,4490 R9.2@4174,4515
SRC_RX2: D6.2 FPC4.5 R15.1 | length 362.8
  Top Layer w6: FPC4.5@5934.68,4738.07 5934.68,4697.32 5947,4685 5971,4685 5983,4673 D6.2@5983,4649.53 5962.01,4649.53 5953.49,4641 5945,4641
  Top Layer w10: FPC4.5@5934.68,4738.07 5934.68,4824.68 5979.02,4869.02 v2(5979.02,4918.39)
SRC_RX4: D5.2 FPC4.4 R13.1 | length 222.1
  Top Layer w6: FPC4.4@5974.05,4738.07 5974.05,4701.95 5991,4685 6071,4685 6083,4673 D5.2@6083,4649.53 6062.01,4649.53 6053.49,4641 6045,4641
SRC_TX2: D7.2 FPC4.6 R17.1 | length 322.2
  Top Layer w6: 5845,4641 5853.49,4641 5862.01,4649.53 D7.2@5883,4649.53 5883,4685 5895.31,4697.31 FPC4.6@5895.31,4738.07
  Top Layer w10: v2(5879.02,4918.39) 5880,4917.4 5880,4845 5895.31,4829.69 FPC4.6@5895.31,4738.07
SRC_TX4: D8.2 FPC4.7 R18.1 | length 200.4
  Top Layer w6: R18.1@5733,4641 5753,4641 5761.53,4649.53 D8.2@5783,4649.53 5783,4675 5797,4689 5845,4689 5855.94,4699.94 FPC4.7@5855.94,4738.07
TXD0: R10.2 U1.37 | length 624.4
  Top Layer w6: U1.37@3604.8,4269.49 3604.8,4318.81 3619,4333 3646.03,4333 3668.03,4355 3875,4355 3997,4477 4071,4477 4084,4490 R10.2@4084,4515
USB-D+: D3.2 U2.4 USB1.A6 USB1.B6 | length 827
  Top Layer w6: U2.4@4385,4616.6 4385,4571 4447,4509 4447,4433 4468,4412 4632,4412 4682.4,4462.4 D3.2@4682.4,4491.69 4682.4,4521.6 4647,4557 4647,4601 4667,4621 4706.06,4621 ; USB1.B6@4705.47,4669.92 4705.47,4621.59 4706.06,4621 ; USB1.A6@4744.84,4669.92 4744.84,4629 4736.84,4621 4706.06,4621
USB-D-: D3.3 U2.5 USB1.A7 USB1.B7 | length 951.5
  Top Layer w6: U2.5@4404.7,4616.6 4404.7,4583.3 v1(4425,4563) ; v1(4425,4493) 4425,4430 4455,4400 4652,4400 4713,4461 4713,4517 4682.4,4547.6 D3.3@4682.4,4578.31 4682.4,4600.4 4691,4609 4747.26,4609 4764.53,4626.27 USB1.B7@4764.53,4669.92 4764.53,4717.47 4755,4727 4735,4727 4725.16,4717.16 USB1.A7@4725.16,4669.92
  Bottom Layer w6: v1(4425,4493) v1(4425,4563)
VCC: CN1.1 CN2.1 F1.1 | length 500.4
  Top Layer w30: v2(6074.98,3060.12) CN2.1@6074.98,3310.32 ; CN1.1@6229.69,3614.97 v2(6479.88,3614.97)